# Altium PCB Basic_Logic_gates.PcbDoc
Units mm, origin at the board's own origin, x right, y up, seen from the top; angles counter-clockwise.
Board outline 85 x 180 mm, 2 copper layers (Top Layer, Bottom Layer); 128 components, 88 nets, 317 pads, 4 vias.
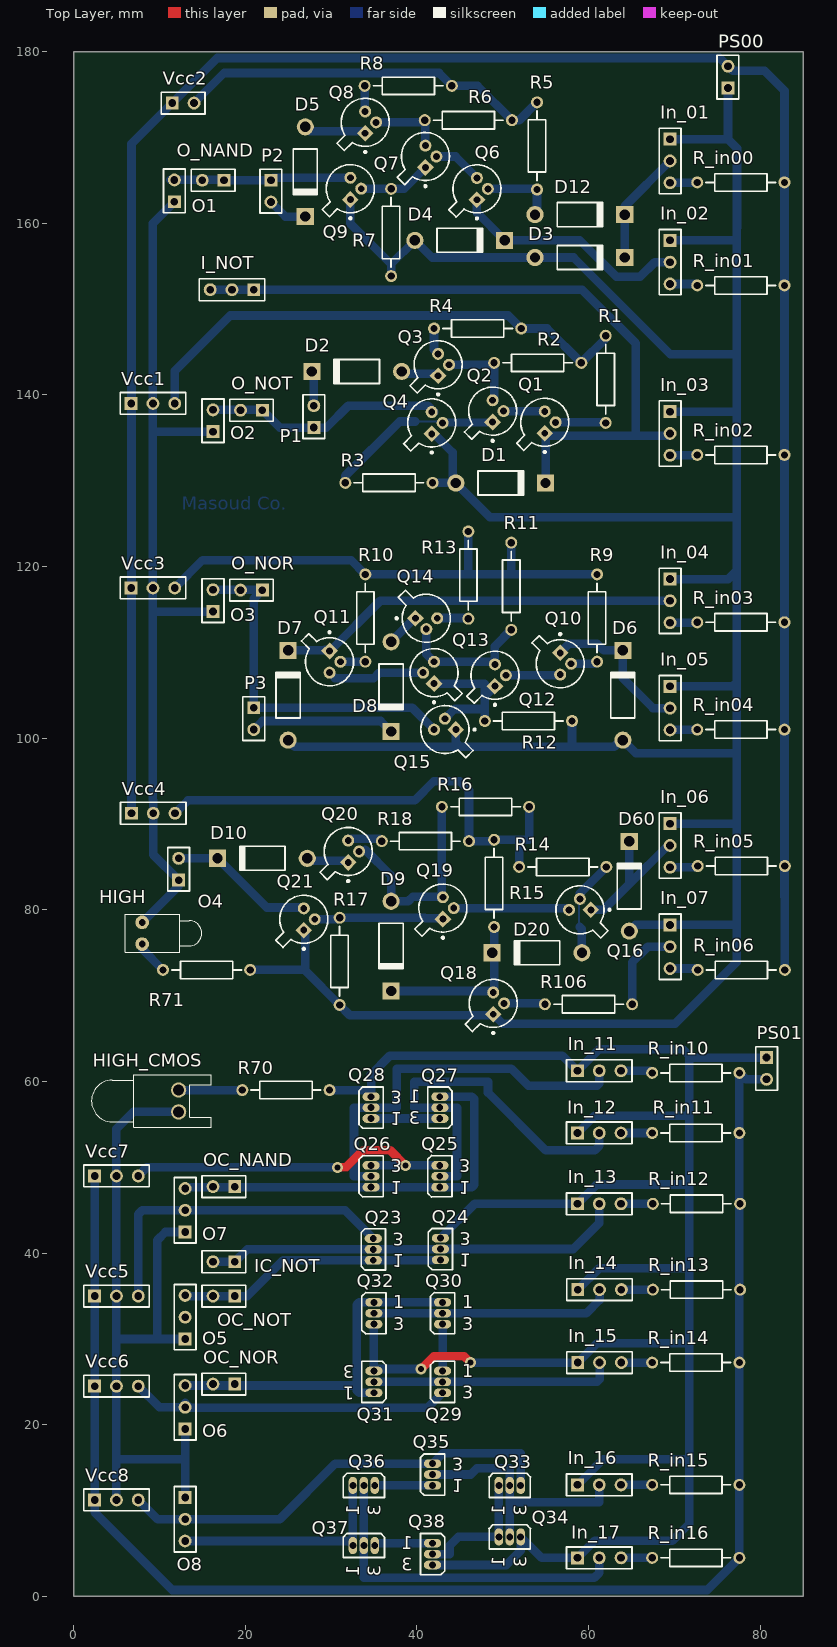
[diagram p0: Top Layer view]
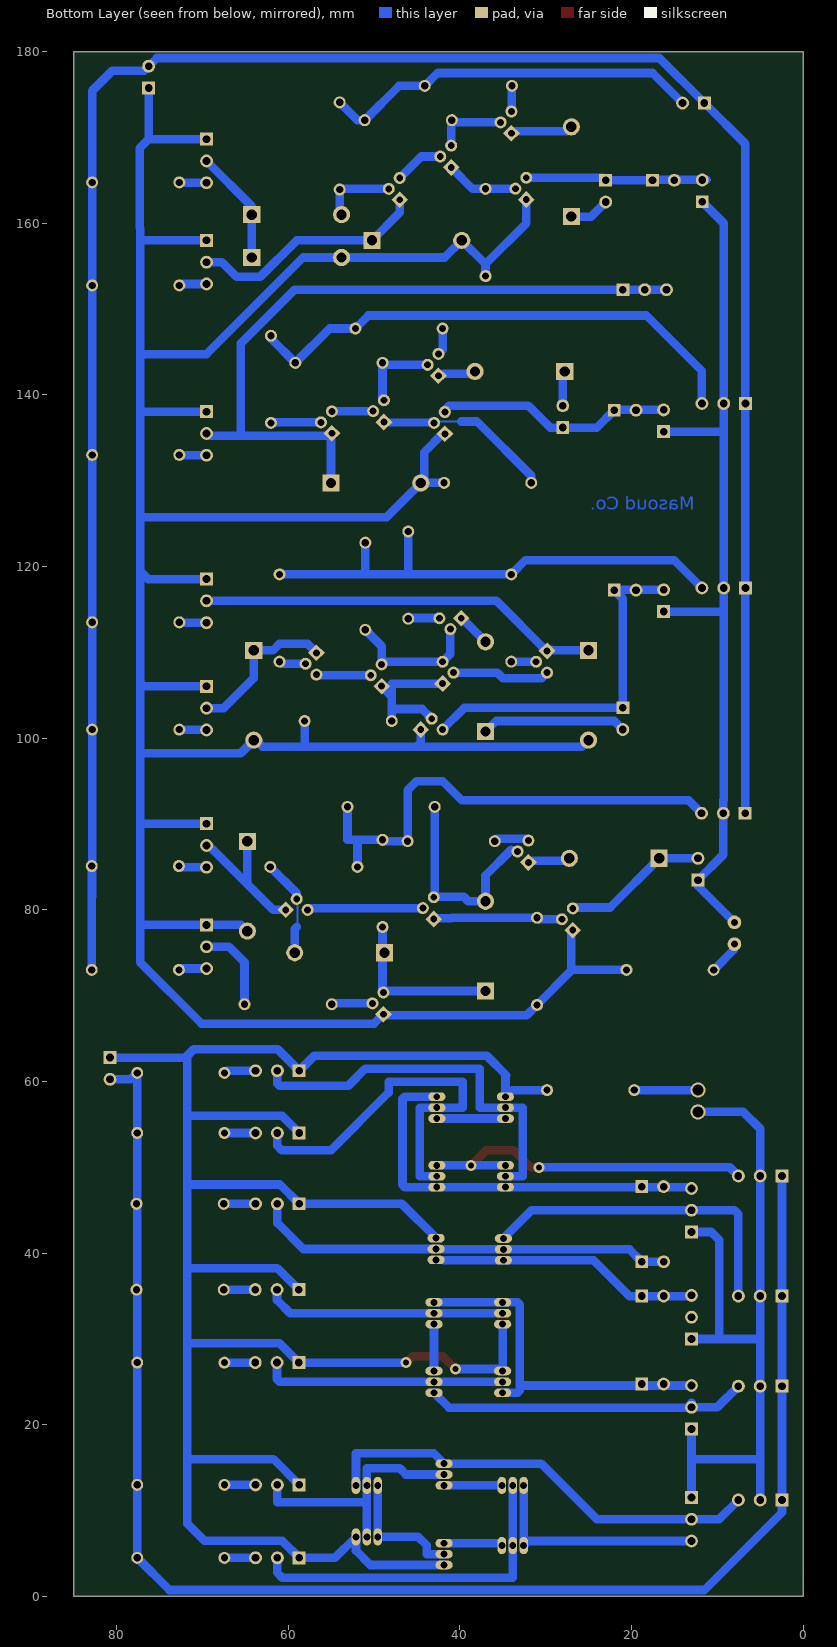
[diagram p1: Bottom Layer view, seen from below]

## Layer stack, top to bottom
Top Solder: solder mask 0.0102, Solder Resist, Dk 3.5
Top Layer: signal copper 0.0356
Dielectric1: dielectric 0.32, FR-4, Dk 4.8
Bottom Layer: signal copper 0.0356
Bottom Solder: solder mask 0.0102, Solder Resist, Dk 3.5

## Board outline
0,0 0,180 85,180 85,0

## Design rules (kind name [scope] priority, off if disabled: settings)
AssemblyTestPointUsage [All] p1: valid=2
Clearance [All] p1: gap=0.254
FabricationTestPointUsage TestPointUsage [All] p1: valid=2 allowmultiple=FALSE
FabricationTestpoint Testpoint [All] p1: side=3 testpointundercomponent=TRUE minsize=1.016 maxsize=2.54 preferedsize=1.524 minholesize=0 maxholesize=1.016 preferedholesize=0.813 testpointgrid=0.025 allowsidetop=TRUE allowsidebottom=TRUE usegrid=TRUE gridtolerance=0
MinimumSolderMaskSliver [All] p1: minsoldermaskwidth=0.065
PolygonConnect [All] p1: connectstyle=Relief reliefconductorwidth=0.254 reliefentries=4 polygonreliefangle="90 Angle" airgapwidth=0.254
RoutingVias [All] p1: holewidth=0.711 width=1.27 viastyle="Through Hole" minholewidth=0.711 minwidth=1.27 maxholewidth=0.711 maxwidth=1.27
SilkToSolderMaskClearance [IsPad vs HasFootprint('LED-1')] p1: minsilkscreentomaskgap=0.06 clearancetoexposedcopper=TRUE
SilkToSolderMaskClearance SilkscreenOverComponentPads [IsPad] p2: minsilkscreentomaskgap=0.2 clearancetoexposedcopper=TRUE
SolderMaskExpansion [All] p1: expansion=0.102
Width [All] p1: maxlimit=2 minlimit=0.25 preferedwidth=1
25 further rules are at their usual default settings.

## Components (designator, comment, footprint, x,y, rotation, side; value= is the part's Value field where it differs from the comment)
D1 "Diode 1N4007" DO-41 49.77,129.73 r0 top
D2 "Diode 1N4007" DO-41 33,142.73 r180 top
D3 "Diode 1N4007" DO-41 59,156 r0 top
D4 "Diode 1N4007" DO-41 45,158 r0 top
D5 "Diode 1N4007" DO-41 27,166 r270 top
D6 "Diode 1N4007" DO-41 64,105 r90 top
D7 "Diode 1N4007" DO-41 25,105 r90 top
D8 "Diode 1N4007" DO-41 37,106 r270 top
D9 "Diode 1N4007" DO-41 37,75.77 r270 top
D10 "Diode 1N4007" DO-41 22,86 r180 top
D12 "Diode 1N4007" DO-41 59,161 r0 top
D20 "Diode 1N4007" DO-41 54,75 r180 top
D60 "Diode 1N4007" DO-41 64.75,82.75 r90 top
HIGH "LED0" LED-1 8,77.27 r0 top
HIGH_CMOS "LED0" LED-0 12.25,57.73 r270 top
I_NOT "Header 3" HDR1X3 21,152.25 r180 top
IC_NOT "Header 2" HDR1X2 18.79,39 r180 top
In_01 "Header 3" HDR1X3 69.5,169.79 r270 top
In_02 "Header 3" HDR1X3 69.5,158 r270 top
In_03 "Header 3" HDR1X3 69.5,138.04 r270 top
In_04 "Header 3" HDR1X3 69.5,118.54 r270 top
In_05 "Header 3" HDR1X3 69.5,106.04 r270 top
In_06 "Header 3" HDR1X3 69.5,90.04 r270 top
In_07 "Header 3" HDR1X3 69.5,78.24 r270 top
In_11 "Header 3" HDR1X3 58.71,61.25 r0 top
In_12 "Header 3" HDR1X3 58.71,54 r0 top
In_13 "Header 3" HDR1X3 58.71,45.75 r0 top
In_14 "Header 3" HDR1X3 58.75,35.75 r0 top
In_15 "Header 3" HDR1X3 58.75,27.25 r0 top
In_16 "Header 3" HDR1X3 58.71,13 r0 top
In_17 "Header 3" HDR1X3 58.71,4.5 r0 top
O1 "Header 2" HDR1X2 11.75,162.5 r90 top
O2 "Header 2" HDR1X2 16.25,135.71 r90 top
O3 "Header 2" HDR1X2 16.25,114.75 r90 top
O4 "Header 2" HDR1X2 12.25,83.46 r90 top
O5 "Header 3" HDR1X3 13,30 r90 top
O6 "Header 3" HDR1X3 13,19.5 r90 top
O7 "Header 3" HDR1X3 13,42.46 r90 top
O8 "Header 3" HDR1X3 13,11.54 r270 top
O_NAND "Header 2" HDR1X2 17.54,165 r180 top
O_NOR "Header 2" HDR1X2 22,117.25 r180 top
O_NOT "Header 2" HDR1X2 22,138.21 r180 top
OC_NAND "Header 2" HDR1X2 18.79,47.75 r180 top
OC_NOR "Header 2" HDR1X2 18.79,24.75 r180 top
OC_NOT "Header 2" HDR1X2 18.79,35 r180 top
P1 "Header 2" HDR1X2 28,136.19 r90 top
P2 "Header 2" HDR1X2 23,165 r270 top
P3 "Header 2" HDR1X2 21,103.54 r270 top
PS00 "Header 2" HDR1X2 76.25,175.75 r90 top
PS01 "Header 2" HDR1X2 80.75,62.79 r270 top
Q1 "2N3904" TO-52#1 54.9,136.8 r90 top
Q2 "2N3904" TO-52#1 48.83,138.1 r90 top
Q3 "2N3904" TO-52#1 42.48,143.5 r90 top
Q4 "2N3904" TO-52#1 41.73,136.73 r90 top
Q6 "2N3904" TO-52#1 47,164 r90 top
Q7 "2N3904" TO-52#1 41,167.77 r90 top
Q8 "2N3904" TO-52#1 33.98,171.75 r90 top
Q9 "2N3904" TO-52#1 32.25,164.02 r90 top
Q10 "2N3904" TO-52#2 56.7,108.67 r270 top
Q11 "2N3904" TO-52#2 29.83,108.9 r270 top
Q12 "2N3904" TO-52#1 49.1,107.33 r90 top
Q13 "2N3904" TO-52#2 42,107.63 r90 top
Q14 "2N3904" TO-52#1 41.1,113.97 r0 top
Q15 "2N3904" TO-52#1 43.27,101 r180 top
Q16 "2N3904" TO-52#1 59,80 r180 top
Q18 "2N3904" TO-52#1 48.9,69.1 r90 top
Q19 "2N3904" TO-52#1 43.03,80.2 r90 top
Q20 "2N3904" TO-52#1 32,86.8 r90 top
Q21 "2N3904" TO-52#1 26.83,78.9 r90 top
Q23 "MOSFET-P" E3#1 34.925,40.437 r0 top
Q24 "MOSFET-N" E3#1 42.75,40.48 r0 top
Q25 "MOSFET-P" E3#1 42.675,48.957 r0 top
Q26 "MOSFET-P" E3#1 34.675,48.957 r0 top
Q27 "MOSFET-N" E3#1 42.675,56.957 r180 top
Q28 "MOSFET-N" E3#1 34.675,56.957 r0 top
Q29 "MOSFET-P" E3#2 43,25 r0 top
Q30 "MOSFET-P" E3#2 43,33 r0 top
Q31 "MOSFET-N" E3#2 35,25 r180 top
Q32 "MOSFET-N" E3#2 35,33 r0 top
Q33 "MOSFET-P" E3#1 50.825,12.937 r270 top
Q34 "MOSFET-N" E3#1 50.825,6.937 r270 top
Q35 "MOSFET-P" E3#1 41.825,14.207 r0 top
Q36 "MOSFET-P" E3#1 33.825,12.937 r270 top
Q37 "MOSFET-N" E3#1 33.825,5.937 r270 top
Q38 "MOSFET-N" E3#1 41.825,4.937 r180 top
R1 "4K" AXIAL-0.4 62,141.81 r90 top
R2 "1.6K" AXIAL-0.4 54.08,143.73 r0 top
R3 "1K" AXIAL-0.4 36.75,129.75 r180 top
R4 "130" AXIAL-0.4 47.08,147.73 r0 top
R5 "4K" AXIAL-0.4 54,169 r90 top
R6 "1.6K" AXIAL-0.4 46,172 r0 top
R7 "1K" AXIAL-0.4 37,158.92 r90 top
R8 "130" AXIAL-0.4 39,176 r0 top
R9 "4K" AXIAL-0.4 61,114 r90 top
R10 "4K" AXIAL-0.4 34,114 r90 top
R11 "1.6K" AXIAL-0.4 51,117.7 r90 top
R12 "1K" AXIAL-0.4 53,102 r180 top
R13 "130" AXIAL-0.4 46,119 r90 top
R14 "4K" AXIAL-0.4 57,85 r180 top
R15 "4K" AXIAL-0.4 49,83.08 r90 top
R16 "1.6K" AXIAL-0.4 48,92 r0 top
R17 "1K" AXIAL-0.4 31,74 r90 top
R18 "130" AXIAL-0.4 41,88 r0 top
R70 "470" AXIAL-0.4 24.75,59 r180 top
R71 "470" AXIAL-0.4 15.5,73 r180 top
R106 "470" AXIAL-0.4 60,69 r0 top
R_in00 "1K" AXIAL-0.4 77.75,164.75 r180 top
R_in01 "1K" AXIAL-0.4 77.75,152.75 r180 top
R_in02 "1K" AXIAL-0.4 77.75,133 r180 top
R_in03 "1K" AXIAL-0.4 77.75,113.5 r180 top
R_in04 "1K" AXIAL-0.4 77.75,101 r180 top
R_in05 "1K" AXIAL-0.4 77.8,85.1 r180 top
R_in06 "1K" AXIAL-0.4 77.8,73 r180 top
R_in10 "1K" AXIAL-0.4 72.5,61 r180 top
R_in11 "1K" AXIAL-0.4 72.5,54 r180 top
R_in12 "1K" AXIAL-0.4 72.58,45.75 r180 top
R_in13 "1K" AXIAL-0.4 72.58,35.75 r180 top
R_in14 "1K" AXIAL-0.4 72.5,27.25 r180 top
R_in15 "1K" AXIAL-0.4 72.5,13 r180 top
R_in16 "1K" AXIAL-0.4 72.5,4.5 r180 top
Vcc1 "Header 3" HDR1X3 6.71,139 r0 top
Vcc2 "Header 2" HDR1X2 11.5,174 r0 top
Vcc3 "Header 3" HDR1X3 6.71,117.5 r0 top
Vcc4 "Header 3" HDR1X3 6.75,91.25 r0 top
Vcc5 "Header 3" HDR1X3 2.46,35 r0 top
Vcc6 "Header 3" HDR1X3 2.46,24.5 r0 top
Vcc7 "Header 3" HDR1X3 2.46,49 r0 top
Vcc8 "Header 3" HDR1X3 2.46,11.25 r0 top

## Footprints (in the part's own frame and the unit in brackets; to place one, negate y for a bottom-side part, rotate by r counter-clockwise, add the part's x,y. Pads: shape width x height; smd on the part's side, far side on the other; paste and mask are expansions set on the pad)
AXIAL-0.4 [mm] "Axial Device, Thru-Hole; 2 Leads; 0.4 in Pin Spacing"
  round 1.4 hole 0.85: 1(-5.08,0) 2(5.08,0)
  silkscreen extent -4.06,-1.02 4.06,1.02
DO-41 [mm] "Diode, Axial; Body 5.2 x 2.7 mm (LxDia. max), Lead Dia. 0.86 mm (max)"
  round 2 hole 1.2: 1(-5.23,0)
  rect 2x2 hole 1.2: 2(5.23,0)
  silkscreen extent -2.65,-1.4 2.75,1.4
E3#1 [mm] "TO, Flat Index; 3 In-Line, Axial Leads; Body Dia. 4.6mm; Lead Dia. 0.5 mm (max)"
  oval 2x1 hole 0.8: 1(0,-1.27) 2(0,0) 3(0,1.27)
  silkscreen extent -1.41,-2.41 1.41,2.41
E3#2 [mm] "TO, Flat Index; 3 In-Line, Axial Leads; Body Dia. 4.6mm; Lead Dia. 0.5 mm (max)"
  oval 2x1 hole 0.8: 1(0,1.27) 2(0,0) 3(0,-1.27)
  silkscreen extent -1.41,-2.41 1.41,2.41
HDR1X2 [mm] "Connector; Header; 2 Position"
  rect 1.5x1.5 hole 0.9: 1(0,0)
  round 1.5 hole 0.9: 2(2.54,0)
  silkscreen extent -1.27,-1.27 3.81,1.27
HDR1X3 [mm] "Connector; Header; 3 Position"
  rect 1.5x1.5 hole 0.9: 1(0,0)
  round 1.5 hole 0.9: 2(2.54,0) 3(5.08,0)
  silkscreen extent -1.27,-1.27 6.35,1.27
LED-0 [mil] "LED; 2 Leads"
  round 70 hole 50: 1(50,0) 2(-50,0)
  silkscreen extent -120,-400 120,150
LED-1 [mm] "LED; 2 Leads"
  round 1.6 hole 0.8: 1(0,1.27) 2(0,-1.27)
  silkscreen extent -2,-2.2 6.95,2.2
TO-52#1 [mm] "Can; 3 Leads; Pin Circle Dia. 2.54 mm; Lead Dia. 0.48 mm (max)"
  rect 1.4x1.4 hole 0.8 rot 45: 1(-1.27,0)
  round 1.4 hole 0.8: 2(0,-1.27) 3(1.27,0)
  silkscreen extent -3.57,-2.8 2.8,3.28, body extent -2.8,-2.8 2.8,2.8, height 2.67
TO-52#2 [mm] "Can; 3 Leads; Pin Circle Dia. 2.54 mm; Lead Dia. 0.48 mm (max)"
  rect 1.4x1.4 hole 0.8 rot 135: 1(-1.27,0)
  round 1.4 hole 0.8: 2(0,1.27) 3(1.27,0)
  silkscreen extent -3.57,-3.28 2.8,2.8, body extent -2.8,-2.8 2.8,2.8, height 2.67

## Part data
D1 D2 D3 D4 D5 D6 D7 D8 D9 D10 D12 D20 D60: "1 Amp General Purpose Rectifier"
HIGH HIGH_CMOS: "Typical INFRARED GaAs LED"
I_NOT In_01 In_02 In_03 In_04 In_05 In_06 In_07 In_11 In_12 In_13 In_14 In_15 In_16 In_17 O5 O6 O7 O8 Vcc1 Vcc3 Vcc4 Vcc5 Vcc6 Vcc7 Vcc8: "Header, 3-Pin"
IC_NOT O1 O2 O3 O4 O_NAND O_NOR O_NOT OC_NAND OC_NOR OC_NOT P1 P2 P3 PS00 PS01 Vcc2: "Header, 2-Pin"
Q1 Q2 Q3 Q4 Q6 Q7 Q8 Q9 Q10 Q11 Q12 Q13 Q14 Q15 Q16 Q18 Q19 Q20 Q21: "NPN General Purpose Amplifier"
Q23 Q25 Q26 Q29 Q30 Q33 Q35 Q36: "P-Channel MOSFET"
Q24 Q27 Q28 Q31 Q32 Q34 Q37 Q38: "N-Channel MOSFET"
R1 R2 R3 R4 R5 R6 R7 R8 R9 R10 R11 R12 R13 R14 R15 R16 R17 R18 R70 R71 R106 R_in00 R_in01 R_in02 R_in03 R_in04 R_in05 R_in06 R_in10 R_in11 R_in12 R_in13 R_in14 R_in15 R_in16: library part Res2, "Resistor"

## Via types
v1: diameter 1.27, hole 0.711, Top Layer to Bottom Layer, 4 vias

## Nets (pads, with @x,y where several pads share a name; then routed paths per layer and width w, separated by ;. In a path a pad name is that pad's centre, name@x,y a point inside that pad or via, vN(x,y) a via of type N, cw(c..) or ccw(c..) an arc to the next point about the centre after c; other vN are vias at no path point)
A1: D1.2 I_NOT.1 I_NOT.2 I_NOT.3 In_03.2 Q1.1 | length 83.3
  Bottom Layer w1: I_NOT.3 I_NOT.2 I_NOT.1 59.25,152.25 65.5,146 65.5,135.25 ; D1.2 55,135.46 55.21,135.25 65.5,135.25 ; In_03.2 69.25,135.25 65.5,135.25
A2: D4.2 In_02.2 Q6.1 | length 27.8
  Bottom Layer w1: Q6.1 47,161.23 D4.2 59,158 63.25,153.75 66,153.75 67.71,155.46 In_02.2
A3: D6.2 In_05.2 Q10.1 | length 17.8
  Bottom Layer w1: Q10.1@57,110.27 57.73,111 61,111 61.77,110.23 D6.2 64,107 67.5,103.5 In_05.2
A4: D60.2 In_06.2 Q16.1 | length 17.3
  Bottom Layer w1: Q16.1 61.75,80 64.75,83 ; D60.2 64.75,83 ; In_06.2 69.25,87.5 64.75,83
B2: D3.2 D12.2 In_01.2 | length 13.4
  Bottom Layer w1: D3.2 D12.2 64.23,161.98 In_01.2
B3: D7.2 In_04.2 Q11.1 | length 46.9
  Bottom Layer w1: D7.2 29.23,110.23 29.27,110.27 30,110.27 35.73,116 64,116 In_04.2
EN: In_07.2 R106.2 | length 10.1
  Bottom Layer w1: R106.2 65.08,73.88 66.9,75.7 In_07.2
GND00: D1.1 D3.1 D4.1 D6.1 D7.1 D60.1 In_01.1 In_02.1 In_03.1 In_04.1 In_05.1 In_06.1 In_07.1 PS00.1 Q4.1 Q9.1 Q15.1 Q18.1 Q21.1 R3.1 R7.1 R12.1 R17.1 R71.1 | length 388.6
  Bottom Layer w1: R71.1 26.92,73 27,72.92 ; D7.1 25.77,99 45,99 ; Q21.1@27,77.73 27,72.92 ; R17.1@30.83,68.75 R17.1 ; Q9.1 32.25,159.98 37,155.23 ; R7.1 37,155.23 ; R3.1 44.52,129.75 D1.1 48.52,125.75 77.25,125.75 ; Q4.1@42,135.46 44.16,133.3 D1.1@44.16,130.11 ; Q15.1 44.54,99.46 45,99 ; R12.1 58.08,99.08 58,99 ; D60.1 65.47,78.24 In_07.1 77.11,78.24 77.25,78.1 ; In_06.1 76.99,90.04 77.25,90.3 ; In_05.1 76.79,106.04 77.25,106.5 ; In_04.1 76.29,118.54 77.25,119.5 ; In_03.1 77.04,138.04 77.25,138.25 ; In_02.1 77,158 77.25,158.25 ; In_01.1 76.25,169.79 ; PS00.1 76.25,169.79 ; 27,72.92 R17.1 ; R17.1 32.19,67.73 49,67.73 49.98,66.75 70.1,66.75 77.25,73.9 77.25,78.1 ; 37,155.23 D4.1 41.77,156 D3.1 58.25,156 69.5,144.75 77.25,144.75 ; 45,99 58,99 ; 58,99 63,99 63.77,99.77 D6.1 65.52,98.25 77.25,98.25 ; 76.25,169.79 77.3,168.74 77.3,159.45 77.25,159.4 77.25,158.25 ; 77.25,78.1 77.25,90.3 ; 77.25,90.3 77.25,98.25 ; 77.25,98.25 77.25,106.5 ; 77.25,106.5 77.25,119.5 ; 77.25,119.5 77.25,125.75 ; 77.25,125.75 77.25,138.25 ; 77.25,138.25 77.25,144.75 ; 77.25,144.75 77.25,158.25
GND01: In_11.1 In_12.1 In_13.1 In_14.1 In_15.1 In_16.1 In_17.1 PS01.1 Q24.3 Q28.3 Q31.3 Q32.3 Q34.3 Q38.3 R70.1 | length 264.3
  Top Layer w1: v1(40.5,26.5) 42,28 45.5,28 v1(46.25,27.25)
  Bottom Layer w1: R70.1 33.903,59 Q28.3 34.675,60.675 34.601,60.75 36.851,63 56.96,63 In_11.1 61.21,63.75 71,63.75 71.75,63 ; Q32.3 Q31.3 35.23,26.5 v1(40.5,26.5) ; Q38.3 50.417,3.667 52.095,5.345 Q34.3 54.532,4.5 In_17.1 60.71,6.5 69.75,6.5 71.75,8.5 71.75,16 ; Q24.3 46.75,45.75 In_13.1 60.96,48 71.75,48 ; v1(46.25,27.25) In_15.1 61,29.5 71.75,29.5 ; In_16.1 61.71,16 71.75,16 ; In_12.1 60.71,56 71.75,56 ; In_14.1 61.25,38.25 71.75,38.25 ; PS01.1 71.96,62.79 71.75,63 ; 71.75,16 71.75,29.5 ; 71.75,29.5 71.75,38.25 ; 71.75,38.25 71.75,48 ; 71.75,48 71.75,56 ; 71.75,56 71.75,63
NetD2_1: D2.1 Q3.1 | length 3.9
  Bottom Layer w1: D2.1 38.5,142.46 Q3.1@42,142.46
NetD2_2: D2.2 P1.2 | length 4.1
  Bottom Layer w1: D2.2 28,142.5 P1.2
NetD5_1: D5.1 Q8.1 | length 7.2
  Bottom Layer w1: D5.1 27.5,170.73 Q8.1@34,170.73
NetD5_2: D5.2 P2.2 | length 4.7
  Bottom Layer w1: P2.2 24.69,160.77 D5.2
NetD8_1: D8.1 Q14.1 | length 3.9
  Bottom Layer w1: D8.1 39.73,113.96 Q14.1@39.73,114
NetD8_2: D8.2 P3.2 | length 16.9
  Bottom Layer w1: P3.2 22,102 35.77,102 D8.2
NetD9_1: D9.1 Q19.3 Q20.2 R16.1 | length 24
  Bottom Layer w1: 34,87 37,84 D9.1 39,81 39.54,81.54 43,81.54 42.92,81.62 R16.1
NetD9_2: D9.2 D20.2 Q18.3 R15.1 | length 20
  Bottom Layer w1: D9.2 48.73,70.54 49,70.27 49,74.77 D20.2 49,75.23 R15.1
NetD10_1: D10.1 Q20.1 | length 4.9
  Bottom Layer w1: D10.1 27.5,85.73 Q20.1@32,85.73
NetD12_1: D12.1 Q6.2 R5.1 | length 8.8
  Bottom Layer w1: Q6.2 53.92,164 R5.1 54,161.23 D12.1
NetD20_1: D20.1 Q16.2 R14.1 | length 11.5
  Bottom Layer w0.25: 59,78 58.9,78.1 58.9,81.17 Q16.2
  Bottom Layer w1: 59,78 59.23,77.77 D20.1 ; Q16.2 59,81.92 R14.1
NetHIGH_1: HIGH.1 O1.1 O2.1 O3.1 O4.1 Vcc1.2 Vcc3.2 Vcc4.2 | length 102.1
  Bottom Layer w1: HIGH.1 12.25,82.79 O4.1 9.29,86.42 9.29,92.75 9.25,92.79 9.25,114.75 ; O1.1 9.25,160 Vcc1.2 9.25,136 ; O3.1 9.25,114.75 ; O2.1 9.54,135.71 9.25,136 ; 9.25,114.75 Vcc3.2 9.25,136
NetHIGH_2: HIGH.2 R71.2 | length 4
  Bottom Layer w1: HIGH.2 8,75.42 R71.2
NetHIGH_CMOS_1: HIGH_CMOS.1 O5.1 O6.1 O7.1 O8.1 Vcc5.2 Vcc6.2 Vcc7.2 Vcc8.2 | length 90.6
  Bottom Layer w1: Vcc8.2 5,15.75 ; HIGH_CMOS.1 6.96,56.46 5,54.5 Vcc7.2 Vcc5.2 5,29.75 ; O8.1 13,16 ; O6.1 13,16 ; O5.1 9.75,30 ; O7.1 10.71,42.46 9.75,41.5 9.75,30 ; 5,15.75 5.25,16 13,16 ; 5,15.75 Vcc6.2 5,29.75 ; 5,29.75 5.25,30 9.75,30
NetHIGH_CMOS_2: HIGH_CMOS.2 R70.2 | length 7.4
  Bottom Layer w1: HIGH_CMOS.2 R70.2
NetIC_NOT_1: IC_NOT.1 IC_NOT.2 In_13.2 Q23.2 Q24.2 | length 48.3
  Bottom Layer w1: IC_NOT.2 IC_NOT.1 20.227,40.437 Q23.2 Q24.2@41.925,40.437 ; Q24.2 58.23,40.48 61.25,43.5 In_13.2
NetIn_01_3: In_01.3 R_in00.2 | length 3.2
  Bottom Layer w1: In_01.3 72.63,164.71 R_in00.2
NetIn_02_3: In_02.3 R_in01.2 | length 3.2
  Bottom Layer w1: In_02.3 72.5,152.92 R_in01.2
NetIn_03_3: In_03.3 R_in02.2 | length 3.2
  Bottom Layer w1: In_03.3 72.63,132.96 R_in02.2
NetIn_04_3: In_04.3 R_in03.2 | length 3.2
  Bottom Layer w1: In_04.3 72.63,113.46 R_in03.2
NetIn_05_3: In_05.3 R_in04.2 | length 3.2
  Bottom Layer w1: In_05.3 72.63,100.96 R_in04.2
NetIn_06_3: In_06.3 R_in05.2 | length 3.3
  Bottom Layer w1: In_06.3 72.58,84.96 R_in05.2
NetIn_07_3: In_07.3 R_in06.2 | length 3.3
  Bottom Layer w1: In_07.3 72.56,73.16 R_in06.2
NetIn_11_2: In_11.2 Q26.2 Q28.2 | length 45.5
  Bottom Layer w1: Q26.2 32.675,48.957 32.675,56.957 Q28.2 37.675,56.957 37.675,61.5 51,61.5 53,59.5 61,59.5 61.25,59.75 In_11.2
NetIn_11_3: In_11.3 R_in10.2 | length 3.7
  Bottom Layer w1: In_11.3 67.17,61.25 R_in10.2
NetIn_12_2: In_12.2 Q25.2 Q27.2 | length 45.3
  Bottom Layer w1: Q25.2 44.675,48.957 44.675,56.957 Q27.2 39.675,56.957 39.675,59.957 48.293,59.957 48.293,58.707 55,52 60.75,52 61.25,52.5 In_12.2
NetIn_12_3: In_12.3 R_in11.2 | length 3.6
  Bottom Layer w1: In_12.3 R_in11.2
NetIn_13_3: In_13.3 R_in12.2 | length 3.7
  Bottom Layer w1: In_13.3 R_in12.2
NetIn_14_2: In_14.2 Q30.2 Q32.2 | length 28.1
  Bottom Layer w1: Q32.2 Q30.2 59.75,33 61.29,34.54 In_14.2
NetIn_14_3: In_14.3 R_in13.2 | length 3.7
  Bottom Layer w1: In_14.3 R_in13.2
NetIn_15_2: In_15.2 Q29.2 Q31.2 | length 28.4
  Bottom Layer w1: Q31.2 Q29.2 61,25 61.29,25.29 In_15.2
NetIn_15_3: In_15.3 R_in14.2 | length 3.6
  Bottom Layer w1: In_15.3 R_in14.2
NetIn_16_2: In_16.2 Q33.2 Q34.2 Q35.2 | length 29.7
  Bottom Layer w1: Q35.2 46.27,14.207 47,14.937 50.825,14.937 Q33.2 50.825,11 ; Q34.2 50.825,11 ; In_16.2 61.25,11 54,11 50.825,11
NetIn_16_3: In_16.3 R_in15.2 | length 3.6
  Bottom Layer w1: In_16.3 R_in15.2
NetIn_17_2: In_17.2 Q36.2 Q37.2 | length 40.2
  Bottom Layer w1: Q36.2 Q37.2 33.825,2.175 60.675,2.175 61.25,2.75 In_17.2
NetIn_17_3: In_17.3 R_in16.2 | length 3.6
  Bottom Layer w1: In_17.3 R_in16.2
NetO5_3: O5.3 OC_NOT.1 OC_NOT.2 Q23.1 Q24.1 | length 30.7
  Bottom Layer w1: O5.3 13.08,35 OC_NOT.2 OC_NOT.1 20.25,35 24.417,39.167 Q23.1 Q24.1@41.925,39.167
NetO6_2: O6.2 Q29.3 Vcc6.3 | length 37.4
  Bottom Layer w1: Vcc6.3 10,22.04 O6.2 ; O6.2@13,22.54 13.54,22 41.27,22 Q29.3
NetO6_3: O6.3 OC_NOR.1 OC_NOR.2 Q30.1 Q31.1 Q32.1 | length 42.3
  Bottom Layer w1: O6.3 32.83,24.58 33,24.75 ; Q31.1 33.27,23.73 33,24 33,24.75 ; Q30.1 Q32.1 33.27,34.27 33,34 33,24.75
NetO7_2: O7.2 Q23.3 Vcc5.3 | length 38.5
  Bottom Layer w1: Vcc5.3 7.54,44.54 8,45 O7.2 31.633,45 Q23.3
NetO7_3: O7.3 OC_NAND.1 OC_NAND.2 Q25.1 Q26.1 Q27.1 | length 48
  Bottom Layer w1: O7.3 13.147,47.687 Q26.1 Q25.1 46.405,47.687 46.675,47.957 46.675,57.957 46.405,58.227 Q27.1
NetO8_2: O8.2 Q33.3 Q35.3 Vcc8.3 | length 52.4
  Bottom Layer w1: Vcc8.3 9.79,9 O8.2 24.023,9 30.5,15.477 Q35.3 43.015,16.667 52.095,16.667 Q33.3
NetO8_3: O8.3 Q36.1 Q37.1 | length 26.8
  Bottom Layer w1: O8.3 32.032,6.46 Q37.1 Q36.1
NetQ1_2: Q1.2 R1.1 | length 5.9
  Bottom Layer w1: Q1.2 61.93,136.8 R1.1
NetQ1_3: Q1.3 Q2.2 | length 4.8
  Bottom Layer w1: Q2.2 54.87,138.1 Q1.3
NetQ2_1: Q2.1 Q4.2 R3.2 | length 20.5
  Bottom Layer w0.254: 39.8,136.9 42.83,136.9 Q4.2
  Bottom Layer w1: R3.2 31.67,130.57 38,136.9 39.8,136.9 ; Q4.2@43.3,136.83 Q2.1@49,136.73
NetQ2_3: Q2.3 Q3.2 R2.1 | length 9.8
  Bottom Layer w1: Q3.2 48.77,143.5 R2.1 Q2.3@49,139.27
NetQ3_3: Q3.3 R4.1 | length 3.2
  Bottom Layer w1: R4.1 42,145.25 Q3.3
NetQ6_3: Q6.3 Q7.2 | length 5.8
  Bottom Layer w1: Q7.2 44.5,167.77 Q6.3
NetQ7_1: Q7.1 Q9.2 R7.2 | length 8.5
  Bottom Layer w1: Q9.2 36.98,164.02 R7.2 38.5,164 Q7.1
NetQ7_3: Q7.3 Q8.2 R6.1 | length 8.8
  Bottom Layer w1: Q8.2 40.67,171.75 R6.1 41,171.92 Q7.3
NetQ8_3: Q8.3 R8.1 | length 2.8
  Bottom Layer w1: R8.1 33.92,173.35 Q8.3@34,173.27
NetQ10_2: Q10.2 R9.1 | length 3.2
  Bottom Layer w1: Q10.2 60.75,108.67 R9.1 R9.1@60.92,109
NetQ10_3: Q10.3 Q12.2 | length 6.4
  Bottom Layer w1: Q12.2 56.63,107.33 Q10.3
NetQ11_2: Q11.2 R10.1 | length 3
  Bottom Layer w1: Q11.2 33.98,108.9 R10.1 R10.1@33.92,109
NetQ11_3: Q11.3 Q13.2 | length 11.4
  Bottom Layer w1: Q11.3 30.46,107 35,107 35.63,107.63 Q13.2
NetQ12_1: Q12.1 Q13.1 Q15.2 R12.2 | length 17.1
  Bottom Layer w1: Q13.1 47.92,106.36 47.92,104.88 ; Q15.2 44.4,103.4 47.92,103.4 ; R12.2 47.92,103.4 ; Q12.1 47.92,104.88 ; 47.92,103.4 47.92,104.88
NetQ12_3: Q12.3 Q13.3 Q14.2 R11.1 | length 16.2
  Bottom Layer w1: Q14.2 41.1,109.8 Q13.3 48.8,108.9 Q12.3 49.1,110.72 R11.1
NetQ14_3: Q14.3 R13.1 | length 3.8
  Bottom Layer w1: Q14.3@42.27,114 45.92,114 R13.1
NetQ16_3: Q16.3 Q19.2 | length 13.5
  Bottom Layer w1: Q19.2 57.53,80.2 Q16.3
NetQ18_2: Q18.2 R106.1 | length 4.8
  Bottom Layer w1: Q18.2 54.82,69.1 R106.1
NetQ19_1: Q19.1 Q21.2 R17.2 | length 15
  Bottom Layer w1: Q21.2 30.82,78.9 R17.2 40.92,79.08 41,79 Q19.1@43,79
NetQ20_3: Q20.3 R18.1 | length 4
  Bottom Layer w1: Q20.3@32,88.27 35.65,88.27 R18.1
NetQ25_3: Q25.3 Q26.3 Vcc7.3 | length 41.1
  Top Layer w1: v1(30.75,50) 31.75,50 33.75,52 36.903,52 v1(38.675,50.227)
  Bottom Layer w1: Vcc7.3 8.54,50 v1(30.75,50) ; Q26.3 v1(38.675,50.227) Q25.3
NetQ27_3: Q27.3 Q28.1 | length 8
  Bottom Layer w1: Q28.1 Q27.3
NetQ29_1: Q29.1 Q30.3 | length 5.5
  Bottom Layer w1: Q29.1 Q30.3
NetQ33_1: Q33.1 Q34.1 Q38.2 | length 15.1
  Bottom Layer w1: Q38.2 43.825,4.937 43.825,5.937 44.825,6.937 Q34.1 Q33.1
NetQ35_1: Q35.1 Q36.3 | length 6.7
  Bottom Layer w1: Q36.3 Q35.1
NetQ37_3: Q37.3 Q38.1 | length 6.8
  Bottom Layer w1: Q37.3 35.365,6.207 Q38.1
NetR1_2: R1.2 R2.2 R4.2 Vcc1.3 | length 60.5
  Bottom Layer w1: Vcc1.3 11.79,142.79 18.25,149.25 50.64,149.25 R4.2 55.16,147.73 R2.2 62,146.57 R1.2
NetR5_2: R5.2 R6.2 R8.2 Vcc2.2 | length 44.5
  Bottom Layer w1: Vcc2.2 17.54,177.5 42.58,177.5 R8.2 47.08,176 R6.2 51.92,172 R5.2
NetR9_2: R9.2 R10.2 R11.2 R13.2 Vcc3.3 | length 60.1
  Bottom Layer w1: Vcc3.3 15.04,120.75 32.33,120.75 R10.2 46,119.08 ; R13.2 46,119.08 ; R11.2 51,119.38 50.7,119.08 ; R9.2 50.7,119.08 ; 46,119.08 50.7,119.08
NetR14_2: R14.2 R15.2 R16.2 R18.2 Vcc4.3 | length 59.1
  Bottom Layer w1: Vcc4.3 13.33,92.75 39.75,92.75 42,95 45,95 46.08,93.92 R18.2 48.84,88 R15.2 ; R14.2 51.92,88.08 51.84,88.16 R15.2 ; R16.2 53.08,88.16 R15.2
O1: O2.2 O_NOT.1 O_NOT.2 P1.1 Q4.3 | length 28
  Bottom Layer w1: O2.2 21.96,138.25 O_NOT.1 24.02,136.19 P1.1 29.46,136.19 32,138.73 41.27,138.73 Q4.3@42,138
O2: O1.2 O_NAND.1 O_NAND.2 P2.1 Q9.3 | length 21.1
  Bottom Layer w1: O1.2@11.25,165.04 17.5,165.04 O_NAND.1 P2.1 23.29,165.29 Q9.3
O3: O3.2 O_NOR.1 O_NOR.2 P3.1 Q15.3 | length 41.9
  Bottom Layer w1: O3.2 21.96,117.29 O_NOR.1 21,116.25 P3.1 39.46,103.54 Q15.3
O4: D10.2 O4.2 Q21.3 | length 17.1
  Bottom Layer w1: O4.2 D10.2 22.5,80.27 Q21.3@27,80.27
VCC00: PS00.2 R_in00.1 R_in01.1 R_in02.1 R_in03.1 R_in04.1 R_in05.1 R_in06.1 Vcc1.1 Vcc2.1 Vcc3.1 Vcc4.1 | length 265.8
  Bottom Layer w1: Vcc4.1 6.75,169.25 Vcc2.1 16.75,179.25 75.29,179.25 PS00.2 76.79,177.75 80.5,177.75 82.83,175.42 R_in02.1 R_in03.1 R_in04.1 82.83,81.5 ; R_in06.1 R_in05.1
VCC01: PS01.2 R_in10.1 R_in11.1 R_in12.1 R_in13.1 R_in14.1 R_in15.1 R_in16.1 Vcc5.1 Vcc6.1 Vcc7.1 Vcc8.1 | length 179.6
  Bottom Layer w1: Vcc7.1 Vcc5.1 Vcc6.1 Vcc8.1 2.46,9.79 11.5,0.75 73.83,0.75 R_in16.1 R_in15.1 R_in14.1 R_in11.1 R_in10.1 78.33,60.25 PS01.2
pads on no net: O5.2

## Other copper
Bottom Layer:
  text "Masoud Co." at 12.6,126.6 h1.52

## Silkscreen, mask and mechanical layers (free items; w line width, h text height)
Mechanical 16:
  drawing of 1874 lines, arcs and shapes, not listed
  text "1" at 13.714,182.509 h1.78
  text "2" at 86.358,182.509 h1.78
  text "3" at 159.51,182.509 h1.78
  text "4" at 232.408,182.509 h1.78
  text "A" at -20.627,159.497 h1.78
  text "B" at -20.627,111.44 h1.78
  text "B" at 266.393,111.44 h1.78
  text "C" at -20.627,62.926 h1.78
  text "C" at 266.393,62.926 h1.78
  text "ENGINEER:" at 151.458,25.918 h1.14
  text "TITLE:" at 189.558,25.918 h1.14
  text "PCB DESIGNER:" at 151.458,18.425 h1.14
  text "D" at -20.627,14.92 h1.78
  text "D" at 266.393,14.92 h1.78
  text "DATE:" at 151.458,10.678 h1.14
  text "PART NO.:" at 189.558,10.678 h1.14
  text "REV:" at 242.898,10.678 h1.14
  text "Altium Limited" at 118.438,8.138 h1.78
  text ".PRINT_DATE" at 152.728,7.63 h1.78
  text "12a Rodborough Rd" at 118.438,5.598 h1.78
  text "Frenchs Forest" at 118.438,3.058 h1.78
  text "FILE NAME:" at 151.458,3.058 h1.14
  text "DWG NO:" at 189.558,3.058 h1.14
  text "SCALE:" at 242.898,3.058 h1.14
  text "NSW 2086" at 118.438,0.518 h1.78
  text ".PCB_FILE_NAME_NO_PATH" at 152.728,0.01 h1.78
  text "1" at 13.714,-5.451 h1.78
  text "2" at 86.358,-5.451 h1.78
  text "3" at 159.51,-5.451 h1.78
  text "4" at 232.408,-5.451 h1.78

## Text inside footprints (layer, text, board x,y; h text height)
Q23: Top Overlay "3" at 37.2,42.4 h1.5 r180; Top Overlay "1" at 37.2,39.882 h1.5 r180
Q24: Top Overlay "3" at 45.025,42.443 h1.5 r180; Top Overlay "1" at 45.025,39.925 h1.5 r180
Q25: Top Overlay "3" at 44.95,50.92 h1.5 r180; Top Overlay "1" at 44.95,48.402 h1.5 r180
Q26: Top Overlay "3" at 36.95,50.92 h1.5 r180; Top Overlay "1" at 36.95,48.402 h1.5 r180
Q27: Top Overlay "3" at 40.4,54.994 h1.5; Top Overlay "1" at 40.4,57.512 h1.5
Q28: Top Overlay "3" at 36.95,58.92 h1.5 r180; Top Overlay "1" at 36.95,56.402 h1.5 r180
Q29: Top Overlay "3" at 45.275,23.037 h1.5; Top Overlay "1" at 45.275,25.555 h1.5
Q30: Top Overlay "3" at 45.275,31.037 h1.5; Top Overlay "1" at 45.275,33.555 h1.5
Q31: Top Overlay "3" at 32.725,26.963 h1.5 r180; Top Overlay "1" at 32.725,24.445 h1.5 r180
Q32: Top Overlay "3" at 37.275,31.037 h1.5; Top Overlay "1" at 37.275,33.555 h1.5
Q33: Top Overlay "3" at 52.788,10.662 h1.5 r90; Top Overlay "1" at 50.27,10.662 h1.5 r90
Q34: Top Overlay "3" at 52.788,4.662 h1.5 r90; Top Overlay "1" at 50.27,4.662 h1.5 r90
Q35: Top Overlay "3" at 44.1,16.17 h1.5 r180; Top Overlay "1" at 44.1,13.652 h1.5 r180
Q36: Top Overlay "3" at 35.788,10.662 h1.5 r90; Top Overlay "1" at 33.27,10.662 h1.5 r90
Q37: Top Overlay "3" at 35.788,3.662 h1.5 r90; Top Overlay "1" at 33.27,3.662 h1.5 r90
Q38: Top Overlay "3" at 39.55,2.974 h1.5; Top Overlay "1" at 39.55,5.492 h1.5